# Altium PCB board.PcbDoc
Units mm, origin at the board's own origin, x right, y up, seen from the top; angles counter-clockwise.
Board outline 123 x 60 mm, 2 copper layers (Top Layer, Bottom Layer); 114 components, 68 nets, 312 pads, 0 vias.
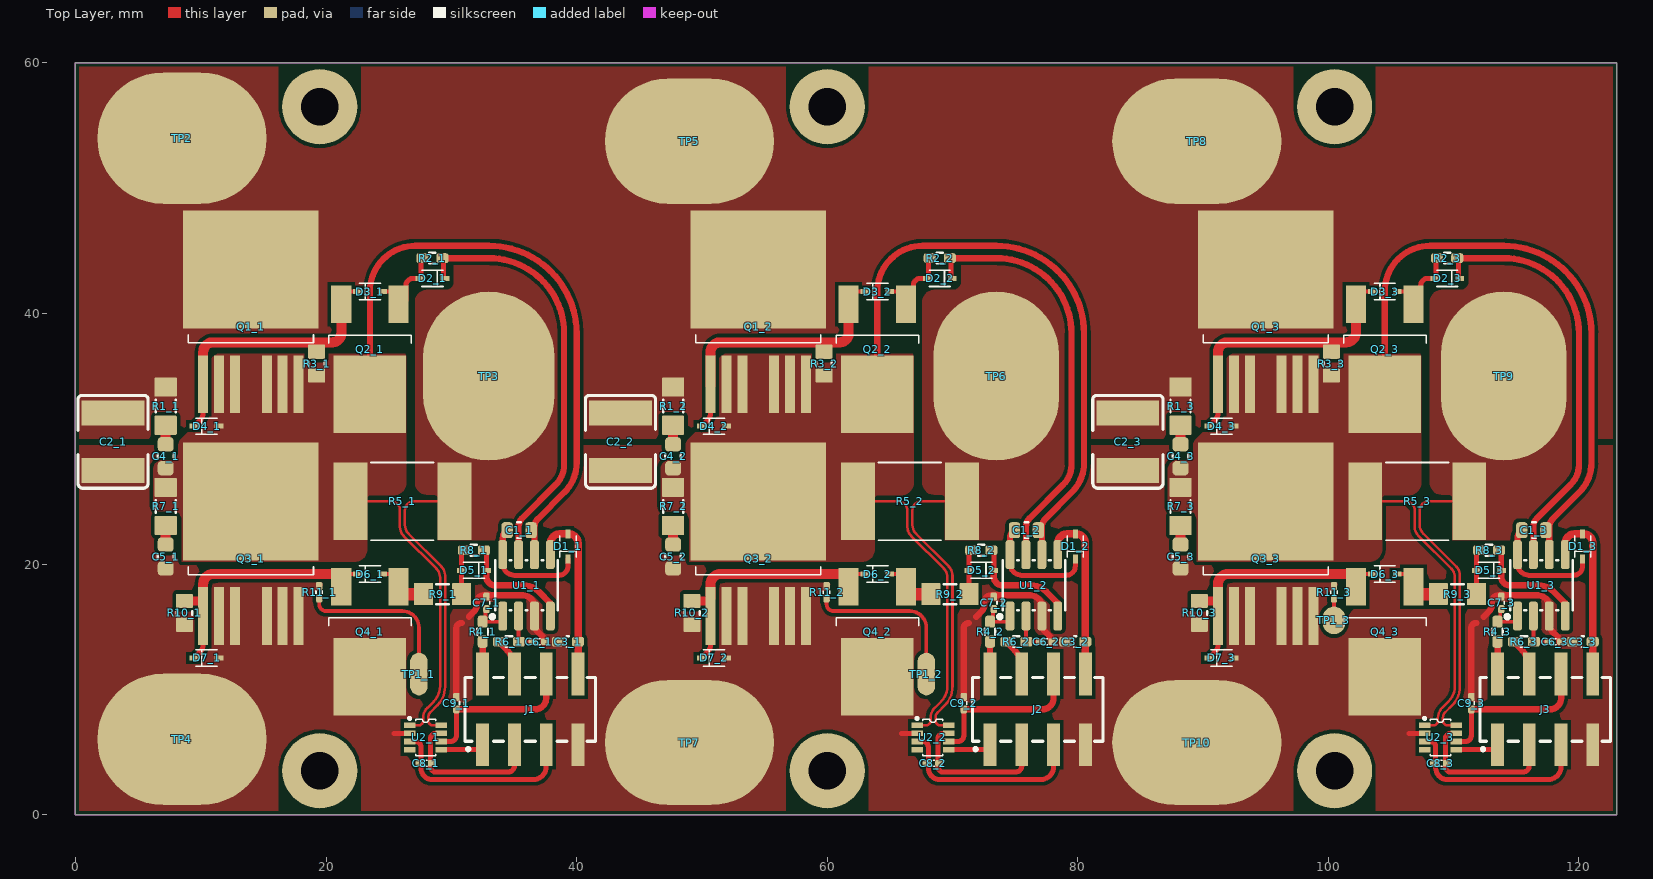
[diagram p0: Top Layer view]
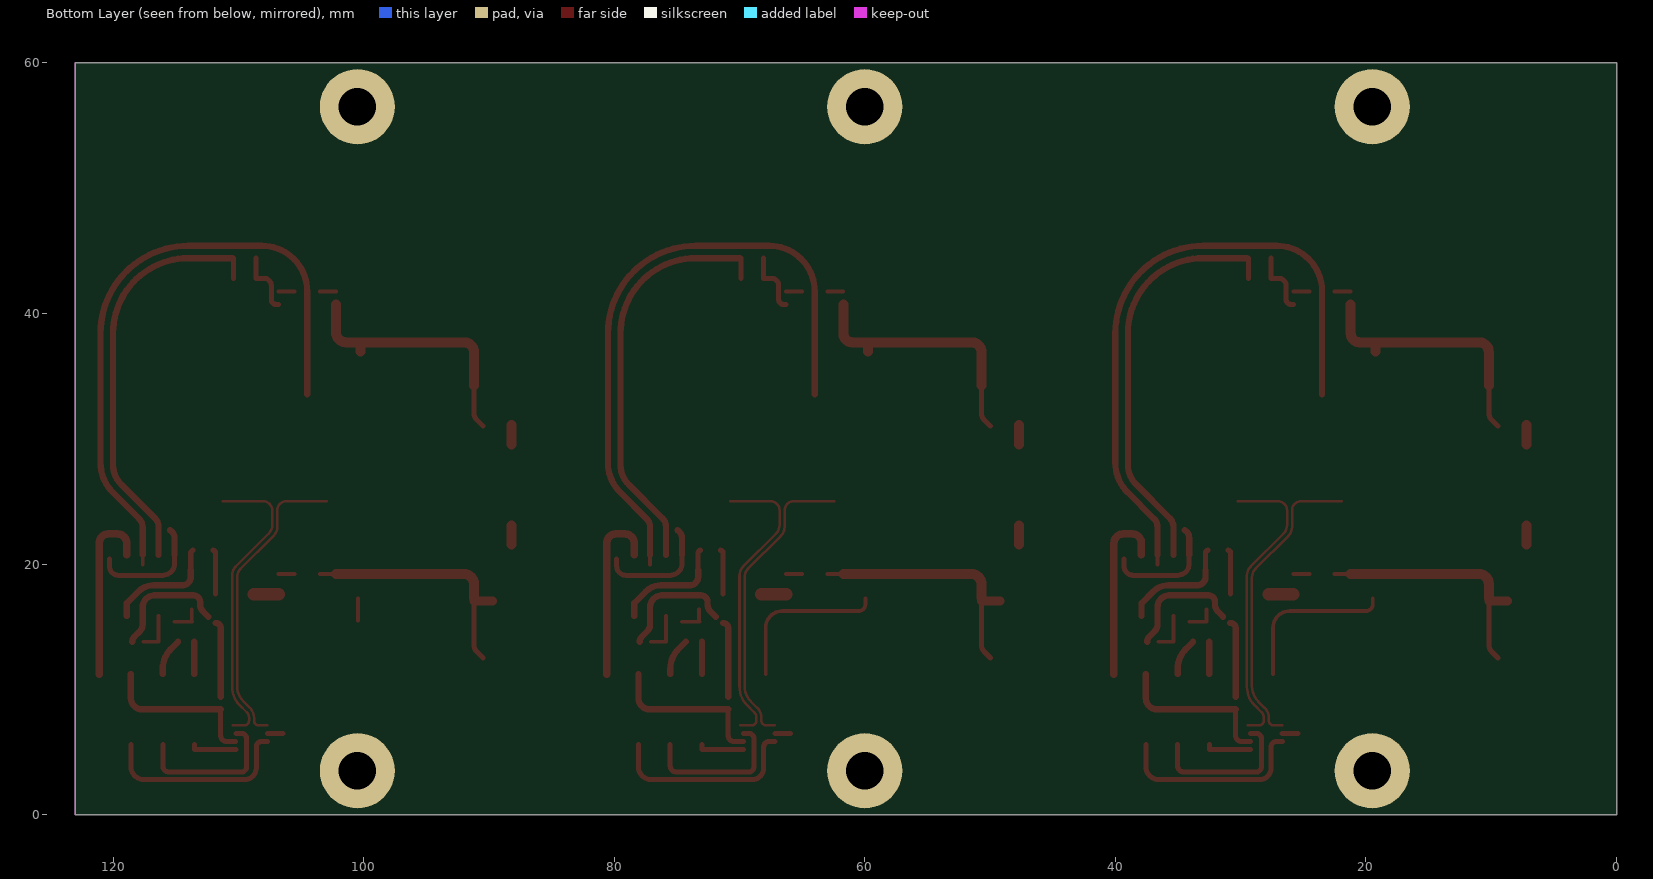
[diagram p1: Bottom Layer view, seen from below]
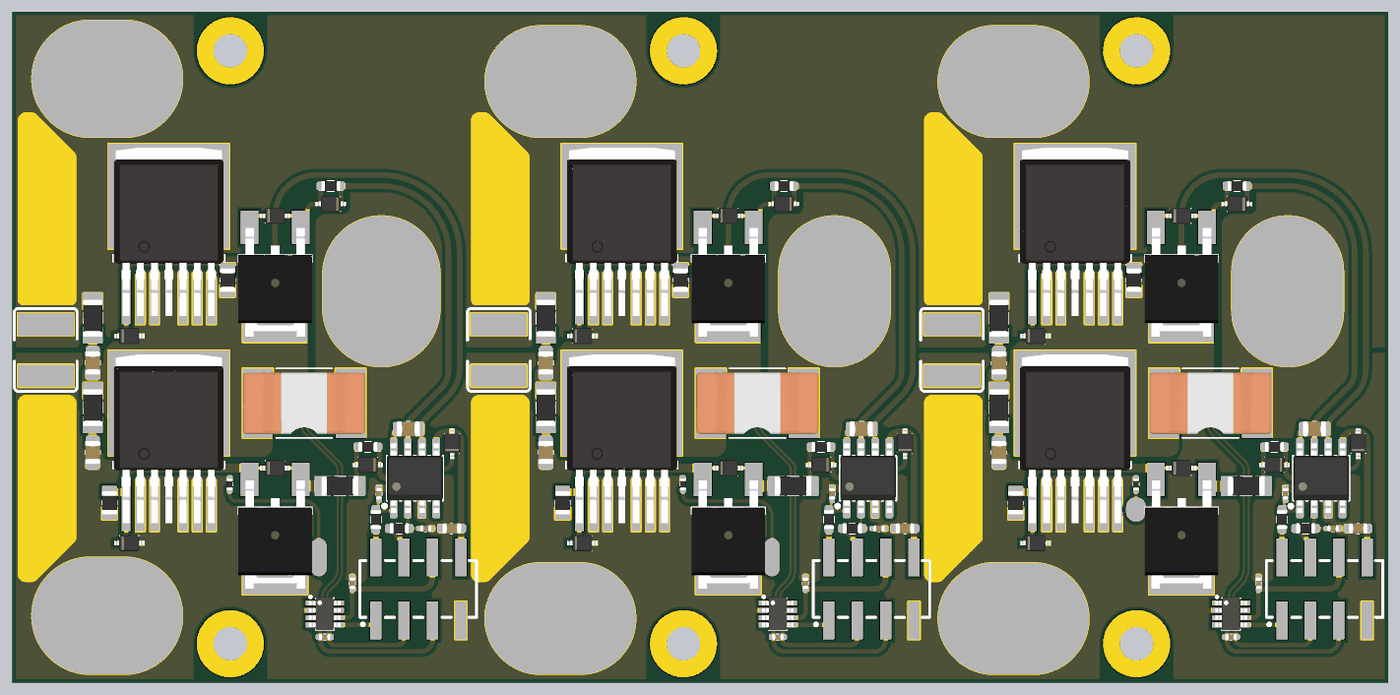
[diagram p2: 3D render of the assembled board from above, using the file's embedded part models]

## Layer stack, top to bottom
Top Solder: solder mask 0.0102, Solder Resist, Dk 3.5
Top Layer: signal copper 0.0356
Dielectric 1: dielectric 0.32, FR-4, Dk 4.8
Bottom Layer: signal copper 0.0356
Bottom Solder: solder mask 0.0102, Solder Resist, Dk 3.5

## Board outline
0,0 123,0 123,60 0,60

## Design rules (kind name [scope] priority, off if disabled: settings)
AcuteAngle [All] p1: minimum=6.00000000000000E+0001 checktracksonly=FALSE
Clearance [All] p1: gap=0.18 ignorepadtopadclearanceinfootprint=FALSE except(0.3: Arc-Fill Arc-Poly Arc-Region Track-Fill Track-Poly Track-Region SMDPad-Fill SMDPad-Poly SMDPad-Region THPad-Fill THPad-Poly THPad-Region Via-Fill Via-Poly Via-Region Fill-Fill Fill-Poly Fill-Region Poly-Poly Poly-Region Region-Region)
ComponentClearance ComponentClearance_1 [HasFootprint('TP2030_SMD')] p1: gap=-1 collisioncheckmode=3 verticalgap=2540 showdistances=FALSE
ComponentClearance [All] p2: gap=0.254 collisioncheckmode=3 verticalgap=0.254 showdistances=FALSE
HoleSize [All] p1: absolutevalues=TRUE maxlimit=5 minlimit=1 maxpercent=80.000 minpercent=20.000
MinimumSolderMaskSliver [All] p1 off: minsoldermaskwidth=0.254
PermittedLayers [All] p1: toplayerpermitted=TRUE bottomlayerpermitted=FALSE
PlaneConnect [All] p1: planeconnectstyle=Direct reliefexpansion=0.508 reliefentries=4 reliefconductorwidth=0.254 reliefairgap=0.254
PolygonConnect [All] p1: connectstyle=Direct reliefconductorwidth=0.254 reliefentries=4 polygonreliefangle="90 Angle" airgapwidth=0.254
RoutingLayers [All] p1: top layer_v5=TRUE bottom layer_v5=FALSE
RoutingVias [All] p1: holewidth=0.711 width=1.27 viastyle="Through Hole" minholewidth=0.711 minwidth=1.27 maxholewidth=0.711 maxwidth=1.27
SilkToSolderMaskClearance [IsPad] p1 off: minsilkscreentomaskgap=0.254 clearancetoexposedcopper=TRUE
SolderMaskExpansion [All] p1: expansion=0.102 istentingtop=FALSE
UnRoutedNet [All] p1: checkbadconnections=TRUE
Width [All] p1: maxlimit=50 minlimit=0.2 preferedwidth=0.254
23 further rules are at their usual default settings.

## Classes and differential pairs
net class C2_3_Nets: GND VB
net class C1_2_Nets: NetC1_2_1 NetC1_2_2
net class C1_1_Nets: NetC1_1_1 NetC1_1_2
net class U1_3_Nets: GND NetC1_3_1 NetC1_3_2 NetC6_3_2 NetC7_3_2 NetD2_3_2 NetD5_3_2 W_Vcc
net class U1_2_Nets: GND NetC1_2_1 NetC1_2_2 NetC6_2_2 NetC7_2_2 NetD2_2_2 NetD5_2_2 V_Vcc
net class U1_1_Nets: GND NetC1_1_1 NetC1_1_2 NetC6_1_2 NetC7_1_2 NetD2_1_2 NetD5_1_2 U_Vcc
net class R10_3_Nets: GND NetD6_3_2
net class R10_2_Nets: GND NetD6_2_2
net class R10_1_Nets: GND NetD6_1_2
net class R9_3_Nets: NetD5_3_1 NetD6_3_1
net class R9_2_Nets: NetD5_2_1 NetD6_2_1
net class R9_1_Nets: NetD5_1_1 NetD6_1_1
net class R3_3_Nets: NetC1_3_2 NetD3_3_2
net class R3_2_Nets: NetC1_2_2 NetD3_2_2
net class R3_1_Nets: NetC1_1_2 NetD3_1_2
net class R1_3_Nets: NetC4_3_2 VB
net class R1_2_Nets: NetC4_2_2 VB
net class R1_1_Nets: NetC4_1_2 VB
net class Q2_3_Nets: NetC1_3_2 NetD2_3_1 NetD3_3_2
net class Q2_2_Nets: NetC1_2_2 NetD2_2_1 NetD3_2_2
net class Q2_1_Nets: NetC1_1_2 NetD2_1_1 NetD3_1_2
net class D4_3_Nets: NetC1_3_2 NetD3_3_2
net class D4_2_Nets: NetC1_2_2 NetD3_2_2
net class D4_1_Nets: NetC1_1_2 NetD3_1_2
net class C7_3_Nets: GND NetC7_3_2
net class C7_2_Nets: GND NetC7_2_2
net class C7_1_Nets: GND NetC7_1_2
net class C6_3_Nets: GND NetC6_3_2
net class C6_2_Nets: GND NetC6_2_2
net class C6_1_Nets: GND NetC6_1_2
net class TP5_Nets: VB
net class TP2_Nets: VB
net class TP1_3_Nets: NetR11_3_1
net class TP1_2_Nets: NetR11_2_1
net class TP1_1_Nets: NetR11_1_1
net class C9_3_Nets: GND W_5V
net class C9_2_Nets: GND V_5V
net class C9_1_Nets: GND U_5V
net class C5_3_Nets: GND NetC5_3_2
net class C5_2_Nets: GND NetC5_2_2
net class C5_1_Nets: GND NetC5_1_2
net class C2_2_Nets: GND VB
net class C2_1_Nets: GND VB
net class C1_3_Nets: NetC1_3_1 NetC1_3_2
net class J3_Nets: GND NetJ3_1 NetJ3_2 NetJ3_3 NetJ3_4 NetJ3_5 NetJ3_6 NetJ3_7 NetJ3_8 W_5V W_H W_Iout W_L W_ref_+ W_ref_- W_Vcc
net class J2_Nets: GND NetJ2_1 NetJ2_2 NetJ2_3 NetJ2_4 NetJ2_5 NetJ2_6 NetJ2_7 NetJ2_8 V_5V V_H V_Iout V_L V_ref_+ V_ref_- V_Vcc
net class J1_Nets: GND NetJ1_1 NetJ1_2 NetJ1_3 NetJ1_4 NetJ1_5 NetJ1_6 NetJ1_7 NetJ1_8 U_5V U_H U_Iout U_L U_ref_+ U_ref_- U_Vcc
net class Q4_1_Nets: GND NetD6_1_1 NetD6_1_2
net class D6_1_Nets: NetD6_1_1 NetD6_1_2
net class D7_3_Nets: GND NetD6_3_2
net class D7_2_Nets: GND NetD6_2_2
net class TP10_Nets: GND
net class TP7_Nets: GND
net class TP9_Nets: W_OUT
net class TP8_Nets: VB
net class TP6_Nets: V_OUT
net class TP3_Nets: U_OUT
net class U2_3_Nets: GND NetC1_3_2 W_5V W_Iout W_OUT W_ref_+ W_ref_-
net class U2_2_Nets: GND NetC1_2_2 V_5V V_Iout V_OUT V_ref_+ V_ref_-
net class U2_1_Nets: GND NetC1_1_2 U_5V U_Iout U_OUT U_ref_+ U_ref_-
net class Q3_3_Nets: GND NetC1_3_2 NetD6_3_2
net class Q3_2_Nets: GND NetC1_2_2 NetD6_2_2
net class Q3_1_Nets: GND NetC1_1_2 NetD6_1_2
net class TP4_Nets: GND NetR12_1
net class R11_3_Nets: GND NetR11_3_1
net class R11_2_Nets: GND NetR11_2_1
net class R11_1_Nets: GND NetR11_1_1
net class R8_3_Nets: NetD5_3_1 NetD5_3_2
net class R8_2_Nets: NetD5_2_1 NetD5_2_2
net class R8_1_Nets: NetD5_1_1 NetD5_1_2
net class R7_3_Nets: NetC1_3_2 NetC5_3_2
net class R7_2_Nets: NetC1_2_2 NetC5_2_2
net class R7_1_Nets: NetC1_1_2 NetC5_1_2
net class R6_3_Nets: NetC6_3_2 W_L
net class R6_2_Nets: NetC6_2_2 V_L
net class R6_1_Nets: NetC6_1_2 U_L
net class R5_3_Nets: NetC1_3_2 W_OUT
net class R5_2_Nets: NetC1_2_2 V_OUT
net class R5_1_Nets: NetC1_1_2 U_OUT
net class R4_3_Nets: NetC7_3_2 W_H
net class R4_2_Nets: NetC7_2_2 V_H
net class R4_1_Nets: NetC7_1_2 U_H
net class R2_3_Nets: NetD2_3_1 NetD2_3_2
net class R2_2_Nets: NetD2_2_1 NetD2_2_2
net class R2_1_Nets: NetD2_1_1 NetD2_1_2
net class Q4_3_Nets: GND NetD6_3_1 NetD6_3_2
net class Q4_2_Nets: GND NetD6_2_1 NetD6_2_2
net class Q1_3_Nets: NetC1_3_2 NetD3_3_2 VB
net class Q1_2_Nets: NetC1_2_2 NetD3_2_2 VB
net class Q1_1_Nets: NetC1_1_2 NetD3_1_2 VB
net class D6_3_Nets: NetD6_3_1 NetD6_3_2
net class D6_2_Nets: NetD6_2_1 NetD6_2_2
net class D7_1_Nets: GND NetD6_1_2
net class D5_3_Nets: NetD5_3_1 NetD5_3_2
net class D5_2_Nets: NetD5_2_1 NetD5_2_2
net class D5_1_Nets: NetD5_1_1 NetD5_1_2
net class D3_3_Nets: NetD2_3_1 NetD3_3_2
net class D3_2_Nets: NetD2_2_1 NetD3_2_2
net class D3_1_Nets: NetD2_1_1 NetD3_1_2
net class D2_3_Nets: NetD2_3_1 NetD2_3_2
net class D2_2_Nets: NetD2_2_1 NetD2_2_2
net class D2_1_Nets: NetD2_1_1 NetD2_1_2
net class D1_3_Nets: NetC1_3_1 W_Vcc
net class D1_2_Nets: NetC1_2_1 V_Vcc
net class D1_1_Nets: NetC1_1_1 U_Vcc
net class C8_3_Nets: W_ref_+ W_ref_-
net class C8_2_Nets: V_ref_+ V_ref_-
net class C8_1_Nets: U_ref_+ U_ref_-
net class C4_3_Nets: NetC1_3_2 NetC4_3_2
net class C4_2_Nets: NetC1_2_2 NetC4_2_2
net class C4_1_Nets: NetC1_1_2 NetC4_1_2
net class C3_3_Nets: GND W_Vcc
net class C3_2_Nets: GND V_Vcc
net class C3_1_Nets: GND U_Vcc
channel class power_phase: "Phase U" "Phase V" "Phase W"

## Components (designator, comment, footprint, x,y, rotation, side; value= is the part's Value field where it differs from the comment)
C1_1 "100nF" C0805_L 35.41,22.7 r0 top (schematic designator C1)
C1_2 "100nF" C0805_L 75.9,22.7 r0 top (schematic designator C1)
C1_3 "100nF" C0805_L 116.4,22.7 r0 top (schematic designator C1)
C2_1 "10uF" C2220 3,29.75 r90 top (schematic designator C2)
C2_2 "10uF" C2220 43.5,29.75 r90 top (schematic designator C2)
C2_3 "10uF" C2220 84,29.75 r90 top (schematic designator C2)
C3_1 "100nF" C0603 39.3,13.8 r0 top (schematic designator C3)
C3_2 "100nF" C0603 79.8,13.8 r0 top (schematic designator C3)
C3_3 "100nF" C0603 120.3,13.8 r0 top (schematic designator C3)
C4_1 "33nF" C0805 7.2,28.6 r90 top (schematic designator C4)
C4_2 "33nF" C0805 47.7,28.6 r90 top (schematic designator C4)
C4_3 "33nF" C0805 88.2,28.6 r90 top (schematic designator C4)
C5_1 "33nF" C0805 7.2,20.6 r90 top (schematic designator C5)
C5_2 "33nF" C0805 47.7,20.6 r90 top (schematic designator C5)
C5_3 "33nF" C0805 88.2,20.6 r90 top (schematic designator C5)
C6_1 "100pF" C0402 36.965,13.8 r180 top (schematic designator C6)
C6_2 "100pF" C0402 77.465,13.8 r180 top (schematic designator C6)
C6_3 "100pF" C0402 118.065,13.8 r180 top (schematic designator C6)
C7_1 "100pF" C0402 32.8,16.9 r270 top (schematic designator C7)
C7_2 "100pF" C0402 73.3,16.9 r270 top (schematic designator C7)
C7_3 "100pF" C0402 113.8,16.9 r270 top (schematic designator C7)
C8_1 "100nF" C0402 27.94,4.1 r0 top (schematic designator C8)
C8_2 "100nF" C0402 68.44,4.1 r0 top (schematic designator C8)
C8_3 "100nF" C0402 108.95,4.1 r0 top (schematic designator C8)
C9_1 "100nF" C0402 30.4,8.9 r270 top (schematic designator C9)
C9_2 "100nF" C0402 70.9,8.9 r270 top (schematic designator C9)
C9_3 "100nF" C0402 111.41,8.9 r270 top (schematic designator C9)
D1_1 "FR107WS" SOD-323 39.31,21.4 r90 top (schematic designator D1)
D1_2 "FR107WS" SOD-323 79.8,21.4 r90 top (schematic designator D1)
D1_3 "FR107WS" SOD-323 120.3,21.4 r90 top (schematic designator D1)
D2_1 "B0530WS" SOD-323 28.486,42.8 r180 top (schematic designator D2)
D2_2 "B0530WS" SOD-323 68.986,42.8 r180 top (schematic designator D2)
D2_3 "B0530WS" SOD-323 109.486,42.8 r180 top (schematic designator D2)
D3_1 "B0530WS" SOD-323 23.5,41.75 r0 top (schematic designator D3)
D3_2 "B0530WS" SOD-323 64,41.75 r0 top (schematic designator D3)
D3_3 "B0530WS" SOD-323 104.5,41.75 r0 top (schematic designator D3)
D4_1 "B0530WS" SOD-323 10.46,31 r0 top (schematic designator D4)
D4_2 "B0530WS" SOD-323 50.96,31 r0 top (schematic designator D4)
D4_3 "B0530WS" SOD-323 91.46,31 r0 top (schematic designator D4)
D5_1 "B0530WS" SOD-323 31.8,19.5 r180 top (schematic designator D5)
D5_2 "B0530WS" SOD-323 72.3,19.5 r180 top (schematic designator D5)
D5_3 "B0530WS" SOD-323 112.824,19.5 r180 top (schematic designator D5)
D6_1 "B0530WS" SOD-323 23.5,19.2 r0 top (schematic designator D6)
D6_2 "B0530WS" SOD-323 64,19.2 r0 top (schematic designator D6)
D6_3 "B0530WS" SOD-323 104.5,19.2 r0 top (schematic designator D6)
D7_1 "B0530WS" SOD-323 10.46,12.5 r0 top (schematic designator D7)
D7_2 "B0530WS" SOD-323 50.96,12.5 r0 top (schematic designator D7)
D7_3 "B0530WS" SOD-323 91.46,12.5 r0 top (schematic designator D7)
J1 "" HDR-SMD_8P-P2.54-V-M-R2-C4-LS8.0 36.3,8.4 r0 top
J2 "" HDR-SMD_8P-P2.54-V-M-R2-C4-LS8.0 76.8,8.4 r0 top
J3 "" HDR-SMD_8P-P2.54-V-M-R2-C4-LS8.0 117.3,8.4 r0 top
Q1_1 "IPB036N12N3" TO-263-7 14,43.5 r0 top (schematic designator Q1)
Q1_2 "IPB036N12N3" TO-263-7 54.5,43.5 r0 top (schematic designator Q1)
Q1_3 "IPB036N12N3" TO-263-7 95,43.5 r0 top (schematic designator Q1)
Q2_1 "MJD45H11" TO-252AA 23.5,33.55 r180 top (schematic designator Q2)
Q2_2 "MJD45H11" TO-252AA 64,33.55 r180 top (schematic designator Q2)
Q2_3 "MJD45H11" TO-252AA 104.5,33.55 r180 top (schematic designator Q2)
Q3_1 "IPB036N12N3" TO-263-7 14,25 r0 top (schematic designator Q3)
Q3_2 "IPB036N12N3" TO-263-7 54.5,25 r0 top (schematic designator Q3)
Q3_3 "IPB036N12N3" TO-263-7 95,25 r0 top (schematic designator Q3)
Q4_1 "MJD45H11" TO-252AA 23.5,11 r180 top (schematic designator Q4)
Q4_2 "MJD45H11" TO-252AA 64,11 r180 top (schematic designator Q4)
Q4_3 "MJD45H11" TO-252AA 104.5,11 r180 top (schematic designator Q4)
R1_1 "1R" R1206 7.2,32.6 r90 top (schematic designator R1)
R1_2 "1R" R1206 47.7,32.6 r90 top (schematic designator R1)
R1_3 "1R" R1206 88.2,32.6 r90 top (schematic designator R1)
R2_1 "24" R0603 28.486,44.412 r0 top (schematic designator R2)
R2_2 "24" R0603 68.986,44.412 r0 top (schematic designator R2)
R2_3 "24" R0603 109.486,44.412 r0 top (schematic designator R2)
R3_1 "100k" R0805 19.25,36 r270 top (schematic designator R3)
R3_2 "100k" R0805 59.75,36 r270 top (schematic designator R3)
R3_3 "100k" R0805 100.25,36 r270 top (schematic designator R3)
R4_1 "2k" R0603 32.5,14.6 r270 top (schematic designator R4)
R4_2 "2k" R0603 73,14.6 r270 top (schematic designator R4)
R4_3 "2k" R0603 113.5,14.6 r270 top (schematic designator R4)
R5_1 "1mR" RES_CSS2H-3920R 26.1,25 r0 top (schematic designator R5)
R5_2 "1mR" RES_CSS2H-3920R 66.6,25 r0 top (schematic designator R5)
R5_3 "1mR" RES_CSS2H-3920R 107.1,25 r0 top (schematic designator R5)
R6_1 "2k" R0603 34.6,13.8 r180 top (schematic designator R6)
R6_2 "2k" R0603 75.1,13.8 r180 top (schematic designator R6)
R6_3 "2k" R0603 115.61,13.8 r180 top (schematic designator R6)
R7_1 "1R" R1206 7.2,24.6 r90 top (schematic designator R7)
R7_2 "1R" R1206 47.7,24.6 r90 top (schematic designator R7)
R7_3 "1R" R1206 88.2,24.6 r90 top (schematic designator R7)
R8_1 "24" R0603 31.8,21.1 r0 top (schematic designator R8)
R8_2 "24" R0603 72.3,21.1 r0 top (schematic designator R8)
R8_3 "24" R0603 112.823,21.1 r0 top (schematic designator R8)
R9_1 "0" R1206 29.3,17.6 r0 top (schematic designator R9)
R9_2 "0" R1206 69.8,17.6 r0 top (schematic designator R9)
R9_3 "0" R1206 110.3,17.6 r0 top (schematic designator R9)
R10_1 "100k" R0805 8.7,16.1 r270 top (schematic designator R10)
R10_2 "100k" R0805 49.2,16.1 r270 top (schematic designator R10)
R10_3 "100k" R0805 89.7,16.1 r270 top (schematic designator R10)
R11_1 "10k NTC" R0402 19.45,17.75 r90 top (schematic designator R11)
R11_2 "10k NTC" R0402 59.95,17.75 r90 top (schematic designator R11)
R11_3 "10k NTC" R0402 100.45,17.75 r90 top (schematic designator R11)
TP1_1 "" TP2030_SMD#1 19.45,11.22 r180 top (schematic designator TP1)
TP1_2 "" TP2030_SMD#2 59.95,15.5 r180 top (schematic designator TP1)
TP1_3 "" TP2030_SMD#3 100.35,13.6 r180 top (schematic designator TP1)
TP2 "" TP2030_SMD#4 8.5,54 r180 top
TP3 "" TP2030_SMD#5 33,35 r180 top
TP4 "" TP2030_SMD#4 8.5,6 r180 top
TP5 "" TP2030_SMD#6 49,53.75 r180 top
TP6 "" TP2030_SMD#6 73.5,35 r270 top
TP7 "" TP2030_SMD#6 49,5.75 r180 top
TP8 "" TP2030_SMD#6 89.5,53.75 r180 top
TP9 "" TP2030_SMD#7 113.6,35 r90 top
TP10 "" TP2030_SMD#6 89.5,5.75 r180 top
U1_1 "IRS2186" SO-8 36,18.3 r0 top (schematic designator U1)
U1_2 "IRS2186" SO-8 76.5,18.3 r0 top (schematic designator U1)
U1_3 "IRS2186" SO-8 117,18.3 r0 top (schematic designator U1)
U2_1 "INA241A1" SOT-23-8 27.94,6.159 r270 top (schematic designator U2)
U2_2 "INA241A1" SOT-23-8 68.44,6.159 r270 top (schematic designator U2)
U2_3 "INA241A1" SOT-23-8 108.95,6.159 r270 top (schematic designator U2)

## Footprints (in the part's own frame and the unit in brackets; to place one, negate y for a bottom-side part, rotate by r counter-clockwise, add the part's x,y. Pads: shape width x height; smd on the part's side, far side on the other; paste and mask are expansions set on the pad)
C0402 [mm] "Chip Capacitor Body"
  rrect50% 0.635x0.508 smd mask+0.05: 1(-0.5,0) 2(0.5,0)
  silkscreen extent -0.13,-0.25 0.13,0.25, body extent -0.52,-0.27 0.53,0.28, height 0.55
C0603 [mil] "Chip Capacitor"
  rrect50% 38x31 smd mask+1.97: 1(-31.5,0) 2(31.5,0)
  silkscreen extent -3,-17 3,17, body extent -33,-18 33,18, height 35
C0805 [mil] "Chip Capacitor"
  rrect50% 45x50 smd mask+1.97: 1(-37.5,0) 2(37.5,0)
  silkscreen extent -6,-25 6,25, body extent -41,-27 41,27, height 53
C0805_L [mm] "Chip Capacitor"
  rrect50% 0.91x1.27 smd mask+0.05: 1(-0.953,0) 2(0.953,0)
  silkscreen extent -0.15,-0.63 0.15,0.63, body extent -1.05,-0.68 1.05,0.67, height 1.35
C2220 [mm]
  rect 2x5 smd: 1(-2.3,0) 2(2.3,0)
  silkscreen extent -3.7,-2.8 3.7,2.8
HDR-SMD_8P-P2.54-V-M-R2-C4-LS8.0 [mm]
  rect 1.02x3.4 smd: 1(-3.81,-2.82) 2(-3.81,2.82) 3(-1.27,-2.82) 4(-1.27,2.82) 5(1.27,-2.82) 6(1.27,2.82) 7(3.81,-2.82) 8(3.81,2.82)
  silkscreen extent -5.21,-3.3 5.21,2.54
R0402 [mil]
  rrect50% 25x20 smd mask+1.97: 1(-19.68,0) 2(19.69,0)
  silkscreen extent -5,-10 5,10, body extent -21,-11 21,11, height 16
R0603 [mil] "Chip Resistor; Body 1.6 x 0.8 mm (LxW typ)"
  rrect50% 38x31 smd mask+1.97: 1(-31.5,0) 2(31.5,0)
  silkscreen extent -10,-17 10,17, body extent -33,-18 33,18, height 22
R0805 [mil] "Chip Resistor; Body 1.6 x 0.8 mm (LxW typ)"
  rrect15% 45x53.15 smd: 1(-37.5,0) 2(37.5,0)
  silkscreen extent -6,-25 6,25, body extent -41,-27 41,27, height 24
R1206 [mil] "Chip Resistor"
  rrect10% 60x70 smd mask+1.97: 1(-60,0) 2(60,0)
  silkscreen extent -20,-31 20,31, body extent -65,-33 65,33, height 26
RES_CSS2H-3920R [mm]
  rect 2.7x6.2 smd: 1(-4.15,0) 2(4.15,0)
  silkscreen extent -2.5,-3.1 2.5,3.1, body extent -5.46,-2.76 5.46,2.76, height 1.98
SO-8 [mm] "SOIC, 8-Leads, Body 4.9x3.9mm, Pitch 1.27mm, IPC Low Density"
  rrect50% 0.7x2.3 smd mask+0.05: 1(-1.905,-2.45) 2(-0.635,-2.45) 3(0.635,-2.45) 4(1.905,-2.45) 5(1.905,2.45) 6(0.635,2.45) 7(-0.635,2.45) 8(-1.905,2.45)
  silkscreen extent -2.77,-2.55 2.5,2, body extent -2.5,-3.1 2.5,3.1, height 1.75
SOD-323 [mm]
  rect 0.701x0.403 smd mask+0.05: 1(1,0)
  rect 0.703x0.401 smd mask+0.05: 2(-1,0)
  silkscreen extent -0.85,-0.65 0.85,0.65, body extent -1.35,-0.72 1.35,0.72, height 1.1
SOT-23-8 [mm]
  rect 0.45x0.9 smd: 1(-0.975,-1.26) 2(-0.325,-1.26) 3(0.325,-1.26) 4(0.975,-1.26) 5(0.975,1.26) 6(0.325,1.26) 7(-0.325,1.26) 8(-0.975,1.26)
  silkscreen extent -1.62,-1.37 1.45,0.8, body extent -1.5,-1.42 1.5,1.42, height 1.2
TO-252AA [mm] "D-PAK"
  rect 1.6x3 smd: 1(-2.286,-7.18) 3(2.286,-7.18)
  rect 5.8x6.2 smd: 2(0,0)
  silkscreen extent -3.3,-4.7 3.28,-4.06, body extent -3.3,-7.1 3.28,2.6, height 2.3
TO-263-7 [mm]
  rect 0.8x4.6 smd: 1(-3.81,-9.15) 2(-2.54,-9.15) 3(-1.27,-9.15) 5(1.27,-9.15) 6(2.54,-9.15) 7(3.81,-9.15)
  rect 10.8x9.4 smd: 4(0,0)
  silkscreen extent -5,-5.84 5,-5.21, body extent -4.91,-10.71 4.91,4.34, height 4.22
TP2030_SMD#1 [mm] "TP30_SMD"
  oval 1.4x3.4 smd mask+0.05: 1(-7.96,0)
TP2030_SMD#2 [mm] "TP30_SMD"
  oval 1.4x3.4 smd mask+0.05: 1(-7.96,4.28)
TP2030_SMD#3 [mm] "TP30_SMD"
  oval 1.8x2.2 smd mask+0.05: 1(-0.1,-1.9)
TP2030_SMD#4 [mm] "TP30_SMD"
  oval 13.5x10.5 smd mask+0.05: 1(0,0)
TP2030_SMD#5 [mm] "TP30_SMD"
  oval 10.5x13.5 smd mask+0.05: 1(0,0)
TP2030_SMD#6 [mm] "TP30_SMD"
  oval 13.5x10 smd mask+0.05: 1(0,0)
TP2030_SMD#7 [mm] "TP30_SMD"
  oval 13.5x10 smd mask+0.05: 1(0,-0.4)

## Part data
C1_1 C1_2 C1_3: library part CAP, "100n 0805"
C2_1 C2_2 C2_3: library part CAP, "10uF 100V 2220"
C3_1 C3_2 C3_3: library part CAP, "100n 0603"
C4_1 C4_2 C4_3 C5_1 C5_2 C5_3: library part CAP, "33nF 0805"
C6_1 C6_2 C6_3 C7_1 C7_2 C7_3: library part CAP, "100pF 0402"
C8_1 C8_2 C8_3 C9_1 C9_2 C9_3: library part CAP, "100nF 0402"
D1_1 D1_2 D1_3: library part "Diode 10TQ035_1"
D2_1 D2_2 D2_3 D3_1 D3_2 D3_3 D4_1 D4_2 D4_3 D5_1 D5_2 D5_3 D6_1 D6_2 D6_3 D7_1 D7_2 D7_3: library part "Diode 10TQ035_1", "FR107WS"
J1 J2 J3: library part "Header 8"
Q1_1 Q1_2 Q1_3 Q3_1 Q3_2 Q3_3: library part NMOS-2, "IPB036N12N3GATMA1"
Q2_1 Q2_2 Q2_3 Q4_1 Q4_2 Q4_3: library part PNP, "MJD45H11"
R1_1 R1_2 R1_3 R7_1 R7_2 R7_3: library part Res1, "1R 1206"
R2_1 R2_2 R2_3 R8_1 R8_2 R8_3: library part Res1, "24R 0603"
R3_1 R3_2 R3_3 R10_1 R10_2 R10_3: library part Res1, "100k 0805"
R4_1 R4_2 R4_3 R6_1 R6_2 R6_3: library part Res1, "2k 0603"
R5_1 R5_2 R5_3: library part Res1
R9_1 R9_2 R9_3: library part Res1, "0R 2512"
R11_1 R11_2 R11_3: library part RES
TP1_1 TP1_2 TP1_3 TP2 TP3 TP4 TP5 TP6 TP7 TP8 TP9 TP10: library part TP_Dup1
U1_1 U1_2 U1_3: "IR2186"

## Free pads (board coordinates)
  round 6 hole 3 unplated: M(19.5,3.5) M(19.5,56.5) M(60,3.5) M(60,56.5) M(100.5,3.5) M(100.5,56.5)

## Nets (pads, with @x,y where several pads share a name; then routed paths per layer and width w, separated by ;. In a path a pad name is that pad's centre, name@x,y a point inside that pad or via, vN(x,y) a via of type N, cw(c..) or ccw(c..) an arc to the next point about the centre after c; other vN are vias at no path point)
GND: C2_1.1 C2_2.1 C2_3.1 C3_1.1 C3_2.1 C3_3.1 C5_1.1 C5_2.1 C5_3.1 C6_1.1 C6_2.1 C6_3.1 C7_1.1 C7_2.1 C7_3.1 C9_1.1 C9_2.1 C9_3.1 D7_1.1 D7_2.1 D7_3.1 J1.7 J2.7 J3.7 Q3_1.2 Q3_1.3 Q3_1.5 Q3_1.6 Q3_1.7 Q3_2.2 Q3_2.3 Q3_2.5 Q3_2.6 Q3_2.7 Q3_3.2 Q3_3.3 Q3_3.5 Q3_3.6 Q3_3.7 Q4_1.2 Q4_2.2 Q4_3.2 R10_1.2 R10_2.2 R10_3.2 R11_1.2 R11_2.2 R11_3.2 TP4.1 TP7.1 TP10.1 U1_1.3 U1_2.3 U1_3.3 U2_1.2 U2_2.2 U2_3.2 | length 53.3
  Top Layer w0.4: 25.436,6.484 U2_1.2 ; 65.936,6.484 U2_2.2 ; 106.436,6.484 U2_3.2@107.68,6.484
  Top Layer w0.5: C9_1.1 30.4,14.876 cw(c30.824,14.876) 30.824,15.3 ; 31.4,15.8 31.834,16.234 ccw(c31.313,16.754) 32.049,16.754 32.049,16.975 cw(c32.575,16.975) 32.575,17.5 35.704,17.5 cw(c35.704,16.569) 36.635,16.569 U1_1.3 36.635,15.17 ccw(c37.372,15.17) 36.851,14.649 37.299,14.201 cw(c36.898,13.8) C6_1.1 ; C9_2.1 70.9,14.876 cw(c71.324,14.876) 71.324,15.3 ; 71.9,15.8 72.334,16.234 ccw(c71.813,16.754) 72.549,16.754 72.549,16.975 cw(c73.075,16.975) 73.075,17.5 76.204,17.5 cw(c76.204,16.569) U1_2.3@77.135,16.569 ; C6_2.1 ccw(c77.398,13.8) 77.799,14.201 77.351,14.649 cw(c77.872,15.17) 77.135,15.17 U1_2.3 ; C9_3.1@111.4,9.4 111.4,14.876 cw(c111.824,14.876) 111.824,15.3 ; 112.4,15.8 112.834,16.234 ccw(c112.313,16.754) 113.049,16.754 113.049,16.975 cw(c113.575,16.975) 113.575,17.5 116.704,17.5 cw(c116.704,16.569) U1_3.3@117.635,16.569 ; C6_3.1@118.465,13.8 ccw(c117.898,13.8) 118.299,14.201 117.851,14.649 cw(c118.372,15.17) 117.635,15.17 U1_3.3 ; U1_2.3 U1_2.3@77.135,16.569 ; U1_2.3 U1_2.3@77.135,16.569 ; U1_3.3 U1_3.3@117.635,16.569 ; U1_3.3 U1_3.3@117.635,16.569
NetC1_1_1: C1_1.1 D1_1.2 U1_1.8 | length 9.5
  Top Layer w0.4: U1_1.8@34.105,20.75 34.105,20.031 ccw(c35.036,20.031) 35.036,19.1 38.573,19.1 ccw(c38.573,19.837) 39.31,19.837 D1_1.2
  Top Layer w0.5: U1_1.8@34.105,20.75 34.105,22.086 cw(c34.816,22.086) C1_1.1
NetC1_1_2: C1_1.2 C4_1.1 D4_1.1 Q1_1.2 Q1_1.3 Q1_1.5 Q1_1.6 Q1_1.7 Q2_1.2 Q3_1.4 R3_1.2 R5_1.1 R7_1.2 U1_1.6 U2_1.1 | length 74.6
  Top Layer w0.2: R5_1.1 25.189,25 cw(c25.189,24.289) 25.9,24.289 25.9,22.954 ccw(c26.891,22.954) 26.19,22.253 28.81,19.633 ; U2_1.1 27.394,7.134 ccw(c27.394,7.49) 27.75,7.49 27.75,7.723 cw(c28.883,7.723) 28.082,8.524 28.6,9.042 ccw(c27.392,10.25) 29.1,10.25 29.1,18.933 ccw(c28.11,18.933) 28.811,19.632
  Top Layer w0.3: U1_1.6@36.635,19.937 U1_1.6
  Top Layer w0.5: Q2_1.2 23.5,41.773 cw(c27.127,41.773) 27.127,45.4 33,45.4 cw(c33,38.4) 40,38.4 40,28.074 cw(c36.682,28.074) 39.028,25.728 36.924,23.624 ccw(c37.626,22.925) 36.635,22.925 U1_1.6
NetC1_2_1: C1_2.1 D1_2.2 U1_2.8 | length 9.5
  Top Layer w0.4: U1_2.8 74.595,20.031 ccw(c75.526,20.031) 75.526,19.1 79.063,19.1 ccw(c79.063,19.837) 79.8,19.837 D1_2.2
  Top Layer w0.5: 74.595,22.086 cw(c75.306,22.086) C1_2.1 ; U1_2.8 74.595,22.086
NetC1_2_2: C1_2.2 C4_2.1 D4_2.1 Q1_2.2 Q1_2.3 Q1_2.5 Q1_2.6 Q1_2.7 Q2_2.2 Q3_2.4 R3_2.2 R5_2.1 R7_2.2 U1_2.6 U2_2.1 | length 74.6
  Top Layer w0.2: R5_2.1 65.689,25 cw(c65.689,24.289) 66.4,24.289 66.4,22.954 ccw(c67.391,22.954) 66.69,22.253 69.31,19.633 ; U2_2.1 67.894,7.134 ccw(c67.894,7.49) 68.25,7.49 68.25,7.723 cw(c69.383,7.723) 68.582,8.524 69.1,9.042 ccw(c67.892,10.25) 69.6,10.25 69.6,18.933 ccw(c68.61,18.933) 69.311,19.632
  Top Layer w0.3: U1_2.6@77.135,19.937 U1_2.6
  Top Layer w0.5: Q2_2.2 64,41.773 cw(c67.627,41.773) 67.627,45.4 73.5,45.4 cw(c73.5,38.4) 80.5,38.4 80.5,28.074 cw(c77.182,28.074) 79.528,25.728 77.424,23.624 ccw(c78.126,22.925) 77.135,22.925 U1_2.6
NetC1_3_1: C1_3.1 D1_3.2 U1_3.8 | length 9.5
  Top Layer w0.4: U1_3.8 115.095,20.031 ccw(c116.026,20.031) 116.026,19.1 119.563,19.1 ccw(c119.563,19.837) 120.3,19.837 D1_3.2
  Top Layer w0.5: U1_3.8 115.095,22.086 cw(c115.806,22.086) C1_3.1
NetC1_3_2: C1_3.2 C4_3.1 D4_3.1 Q1_3.2 Q1_3.3 Q1_3.5 Q1_3.6 Q1_3.7 Q2_3.2 Q3_3.4 R3_3.2 R5_3.1 R7_3.2 U1_3.6 U2_3.1 | length 105.4
  Top Layer w0.2: R5_3.1 106.189,25 cw(c106.189,24.289) 106.9,24.289 106.9,22.954 ccw(c107.891,22.954) 107.19,22.253 109.81,19.633 ; U2_3.1@107.68,7.134 108.394,7.134 ccw(c108.394,7.49) 108.75,7.49 108.75,7.723 cw(c109.883,7.723) 109.082,8.524 109.6,9.042 ccw(c108.392,10.25) 110.1,10.25 110.1,18.933 ccw(c109.11,18.933) 109.811,19.632
  Top Layer w0.3: U1_3.6@117.635,19.937 U1_3.6
  Top Layer w0.5: U1_3.6 117.635,22.925 cw(c118.626,22.925) 117.924,23.624 120.028,25.728 ccw(c117.682,28.074) 121,28.074 121,38.4 ; 104.5,41.773 cw(c108.127,41.773) 108.127,45.4 ; 104.5,41.773 cw(c108.127,41.773) 108.127,45.4 ; 104.5,41.773 Q2_3.2 104.5,41.773 ; 108.127,45.4 114,45.4 ; 108.127,45.4 114,45.4 ; 114,45.4 cw(c114,38.4) 121,38.4 ; 114,45.4 cw(c114,38.4) 121,38.4
NetC4_1_2: C4_1.2 R1_1.1 | length 1.5
  Top Layer w0.8: C4_1.2 R1_1.1
NetC4_2_2: C4_2.2 R1_2.1 | length 1.5
  Top Layer w0.8: C4_2.2 R1_2.1
NetC4_3_2: C4_3.2 R1_3.1 | length 1.5
  Top Layer w0.8: C4_3.2 R1_3.1
NetC5_1_2: C5_1.2 R7_1.1 | length 1.5
  Top Layer w0.8: C5_1.2 R7_1.1
NetC5_2_2: C5_2.2 R7_2.1 | length 1.5
  Top Layer w0.8: C5_2.2 R7_2.1
NetC5_3_2: C5_3.2 R7_3.1 | length 1.5
  Top Layer w0.8: C5_3.2 R7_3.1
NetC6_1_2: C6_1.2 R6_1.1 U1_1.2 | length 3.2
  Top Layer w0.3: R6_1.1@35.365,13.8 U1_1.2 ; R6_1.1 C6_1.2 C6_1.2@36.565,13.8
NetC6_2_2: C6_2.2 R6_2.1 U1_2.2 | length 3.2
  Top Layer w0.3: R6_2.1@75.865,13.8 U1_2.2 ; R6_2.1 C6_2.2 C6_2.2@77.065,13.8
NetC6_3_2: C6_3.2 R6_3.1 U1_3.2 | length 3.2
  Top Layer w0.3: R6_3.1@116.365,13.8 U1_3.2 ; R6_3.1@116.4,13.8 117.465,13.8 C6_3.2
NetC7_1_2: C7_1.2 R4_1.1 U1_1.1 | length 2.3
  Top Layer w0.3: R4_1.1@32.7,15.4 U1_1.1@34.1,15.4 ; R4_1.1@32.725,15.5 C7_1.2@32.725,16.4
NetC7_2_2: C7_2.2 R4_2.1 U1_2.1 | length 2.3
  Top Layer w0.3: R4_2.1@73.2,15.4 U1_2.1@74.6,15.4 ; R4_2.1@73.225,15.5 C7_2.2@73.225,16.4
NetC7_3_2: C7_3.2 R4_3.1 U1_3.1 | length 2.3
  Top Layer w0.3: R4_3.1@113.7,15.4 U1_3.1@115.1,15.4 ; R4_3.1@113.725,15.5 C7_3.2@113.725,16.4
NetD2_1_1: D2_1.1 D3_1.1 Q2_1.1 R2_1.1 | length 6.3
  Top Layer w0.3: D3_1.1 Q2_1.1@25.786,41.75
  Top Layer w0.4: Q2_1.1 26.014,40.73 ccw(c26.014,41.086) 26.37,41.086 26.37,42.218 cw(c26.951,42.218) 26.951,42.8 D2_1.1 ; D2_1.1@27.586,42.8 R2_1.1@27.586,44.412
NetD2_1_2: D2_1.2 R2_1.2 U1_1.7 | length 33.6
  Top Layer w0.4: D2_1.2@29.386,42.8 R2_1.2@29.386,44.412
  Top Layer w0.5: R2_1.2@29.486,44.412 33,44.412 cw(c33,38.412) 39,38.412 39,27.924 cw(c36.769,27.924) 38.346,26.346 35.655,23.655 ccw(c36.356,22.955) 35.365,22.955 U1_1.7
NetD2_2_1: D2_2.1 D3_2.1 Q2_2.1 R2_2.1 | length 6.3
  Top Layer w0.3: D3_2.1 Q2_2.1@66.286,41.75
  Top Layer w0.4: Q2_2.1 66.514,40.73 ccw(c66.514,41.086) 66.87,41.086 66.87,42.218 cw(c67.451,42.218) 67.451,42.8 D2_2.1 ; D2_2.1@68.086,42.8 R2_2.1@68.086,44.412
NetD2_2_2: D2_2.2 R2_2.2 U1_2.7 | length 33.6
  Top Layer w0.4: D2_2.2@69.886,42.8 R2_2.2@69.886,44.412
  Top Layer w0.5: R2_2.2@69.986,44.412 73.5,44.412 cw(c73.5,38.412) 79.5,38.412 79.5,27.924 cw(c77.269,27.924) 78.846,26.346 76.155,23.655 ; U1_2.7 75.865,22.955 cw(c76.856,22.955) 76.154,23.654
NetD2_3_1: D2_3.1 D3_3.1 Q2_3.1 R2_3.1 | length 6.3
  Top Layer w0.3: D3_3.1 Q2_3.1@106.786,41.75
  Top Layer w0.4: Q2_3.1 107.014,40.73 ccw(c107.014,41.086) 107.37,41.086 107.37,42.218 cw(c107.951,42.218) 107.951,42.8 D2_3.1 ; D2_3.1@108.586,42.8 R2_3.1@108.586,44.412
NetD2_3_2: D2_3.2 R2_3.2 U1_3.7 | length 33.6
  Top Layer w0.4: D2_3.2@110.386,42.8 R2_3.2@110.386,44.412
  Top Layer w0.5: R2_3.2@110.486,44.412 114,44.412 cw(c114,38.412) 120,38.412 120,27.924 cw(c117.769,27.924) 119.346,26.346 116.655,23.655 ; U1_3.7 116.365,22.955 cw(c117.356,22.955) 116.654,23.654
NetD3_1_2: D3_1.2 D4_1.2 Q1_1.1 Q2_1.3 R3_1.1 | length 22.4
  Top Layer w0.3: Q2_1.3@21.214,41.75 D3_1.2
  Top Layer w0.4: D4_1.2 9.982,31.522 ccw(c9.479,32.025) 10.19,32.025 Q1_1.1@10.19,34.253
  Top Layer w0.8: Q1_1.1@10.19,34.253 Q1_1.1 10.19,36.9 cw(c10.99,36.9) 10.99,37.7 19.25,37.7 ; R3_1.1 19.25,37.7 ; Q2_1.3 21.214,38.411 cw(c20.503,38.411) 20.503,37.7 19.25,37.7
NetD3_2_2: D3_2.2 D4_2.2 Q1_2.1 Q2_2.3 R3_2.1 | length 27.5
  Top Layer w0.3: Q2_2.3@61.714,41.75 D3_2.2
  Top Layer w0.4: Q1_2.1@50.69,34.253 50.69,32.025 ; Q1_2.1@50.69,35.795 Q1_2.1 50.69,32.025 ; 50.482,31.522 ccw(c49.979,32.025) 50.69,32.025 ; 50.482,31.522 ccw(c49.979,32.025) 50.69,32.025 ; 50.482,31.522 D4_2.2 50.482,31.522
  Top Layer w0.8: Q1_2.1@50.69,34.253 Q1_2.1 50.69,36.9 cw(c51.49,36.9) 51.49,37.7 61.003,37.7 ccw(c61.003,38.411) 61.714,38.411 Q2_2.3 ; R3_2.1 59.75,37.7
NetD3_3_2: D3_3.2 D4_3.2 Q1_3.1 Q2_3.3 R3_3.1 | length 27.4
  Top Layer w0.3: Q2_3.3@102.214,41.75 D3_3.2
  Top Layer w0.4: Q1_3.1@91.19,34.253 91.19,32.025 ; Q1_3.1@91.19,35.795 Q1_3.1 91.19,32.025 ; 90.982,31.522 ccw(c90.479,32.025) 91.19,32.025 ; 90.982,31.522 ccw(c90.479,32.025) 91.19,32.025 ; 90.982,31.522 D4_3.2 90.982,31.522
  Top Layer w0.8: Q1_3.1@91.19,34.253 Q1_3.1 91.19,35.795 91.19,36.9 cw(c91.99,36.9) 91.99,37.7 100.25,37.7 ; R3_3.1 100.25,37.7 ; Q2_3.3 102.214,38.514 cw(c101.4,38.514) 101.4,37.7 100.25,37.7
NetD5_1_1: D5_1.1 R8_1.1 R9_1.2 | length 3.6
  Top Layer w0.4: R9_1.2@30.8,17.6 D5_1.1 30.8,20.901 cw(c30.999,20.901) R8_1.1@30.999,21.1
NetD5_1_2: D5_1.2 R8_1.2 U1_1.4 | length 9.3
  Top Layer w0.4: R8_1.2 cw(c32.601,20.901) 32.8,20.901 D5_1.2
  Top Layer w0.5: D5_1.2 32.8,18.978 ccw(c33.478,18.978) 33.478,18.3 35.763,18.3 cw(c35.763,16.557) 36.995,17.79 37.905,16.88 U1_1.4
NetD5_2_1: D5_2.1 R8_2.1 R9_2.2 | length 3.6
  Top Layer w0.4: R9_2.2@71.3,17.6 D5_2.1 71.3,20.901 cw(c71.499,20.901) R8_2.1
NetD5_2_2: D5_2.2 R8_2.2 U1_2.4 | length 9.3
  Top Layer w0.4: R8_2.2 cw(c73.101,20.901) 73.3,20.901 D5_2.2
  Top Layer w0.5: D5_2.2 73.3,18.978 ccw(c73.978,18.978) 73.978,18.3 76.263,18.3 cw(c76.263,16.557) 77.495,17.79 78.405,16.88 U1_2.4
NetD5_3_1: D5_3.1 R8_3.1 R9_3.2 | length 3.6
  Top Layer w0.4: R9_3.2 D5_3.1 111.824,20.901 cw(c112.023,20.901) R8_3.1
NetD5_3_2: D5_3.2 R8_3.2 U1_3.4 | length 9.3
  Top Layer w0.4: R8_3.2@113.601,21.1 cw(c113.601,20.901) 113.8,20.901 D5_3.2@113.8,19.5
  Top Layer w0.5: D5_3.2@113.8,19.5 113.8,18.978 ccw(c114.478,18.978) 114.478,18.3 116.763,18.3 cw(c116.763,16.557) 117.995,17.79 118.905,16.88 U1_3.4
NetD6_1_1: D6_1.1 Q4_1.1 R9_1.1 | length 3.3
  Top Layer w0.3: D6_1.1 Q4_1.1@25.786,19.2
  Top Layer w1: Q4_1.1@25.786,17.6 R9_1.1
NetD6_1_2: D6_1.2 D7_1.2 Q3_1.1 Q4_1.3 R10_1.1 | length 20.4
  Top Layer w0.3: Q4_1.3@21.214,19.2 D6_1.2
  Top Layer w0.4: D7_1.2 9.982,13.022 ccw(c9.479,13.525) 10.19,13.525 10.19,15.753 Q3_1.1 Q3_1.1@10.19,17.295
  Top Layer w0.7: R10_1.1 Q3_1.1@10.19,17.053
  Top Layer w0.8: Q3_1.1@10.19,17.295 10.19,18.4 cw(c10.99,18.4) 10.99,19.2 Q4_1.3@21.214,19.2
NetD6_2_1: D6_2.1 Q4_2.1 R9_2.1 | length 3.3
  Top Layer w0.3: D6_2.1 Q4_2.1@66.286,19.2
  Top Layer w1: Q4_2.1@66.286,17.6 R9_2.1
NetD6_2_2: D6_2.2 D7_2.2 Q3_2.1 Q4_2.3 R10_2.1 | length 20.4
  Top Layer w0.3: Q4_2.3@61.714,19.2 D6_2.2
  Top Layer w0.4: D7_2.2 50.482,13.022 ccw(c49.979,13.525) 50.69,13.525 50.69,15.753 Q3_2.1 Q3_2.1@50.69,17.295
  Top Layer w0.7: R10_2.1 Q3_2.1@50.69,17.053
  Top Layer w0.8: Q3_2.1@50.69,17.295 50.69,18.4 cw(c51.49,18.4) 51.49,19.2 Q4_2.3@61.714,19.2
NetD6_3_1: D6_3.1 Q4_3.1 R9_3.1 | length 3.3
  Top Layer w0.3: D6_3.1 Q4_3.1@106.786,19.2
  Top Layer w1: Q4_3.1@106.786,17.6 R9_3.1
NetD6_3_2: D6_3.2 D7_3.2 Q3_3.1 Q4_3.3 R10_3.1 | length 20.4
  Top Layer w0.3: Q4_3.3@102.214,19.2 D6_3.2
  Top Layer w0.4: D7_3.2 90.982,13.022 ccw(c90.479,13.525) 91.19,13.525 Q3_3.1 91.19,17.053 Q3_3.1@91.19,17.295
  Top Layer w0.7: R10_3.1 91.19,17.053 Q3_3.1@91.2,17.053
  Top Layer w0.8: Q3_3.1@91.19,17.295 91.19,18.4 cw(c91.99,18.4) 91.99,19.2 Q4_3.3@102.214,19.2
NetR11_1_1: R11_1.1 TP1_1.1 | length 13.2
  Top Layer w0.3: R11_1.1 19.45,16.8 ccw(c20,16.8) 20,16.25 26.086,16.25 cw(c26.086,14.926) 27.41,14.926 TP1_1.1
NetR11_2_1: R11_2.1 TP1_2.1 | length 13.2
  Top Layer w0.3: R11_2.1 59.95,16.8 ccw(c60.5,16.8) 60.5,16.25 66.586,16.25 cw(c66.586,14.926) 67.91,14.926 TP1_2.1
NetR11_3_1: R11_3.1 TP1_3.1 | length 1.8
  Top Layer w0.3: TP1_3.1 R11_3.1
U_5V: C9_1.2 J1.6 U2_1.6 | length 13.2
  Top Layer w0.4: U2_1.6 29.941,5.834 ccw(c29.941,6.293) 30.4,6.293 C9_1.2
  Top Layer w0.5: C9_1.2 36.678,8.4 ccw(c36.678,9.292) 37.57,9.292 J1.6
U_H: J1.2 R4_1.2 | length 2.6
  Top Layer w0.5: J1.2@32.5,11.22 R4_1.2
U_Iout: J1.1 U2_1.5 | length 3.7
  Top Layer w0.4: U2_1.5 32.49,5.184 J1.1
U_L: J1.4 R6_1.2 | length 3
  Top Layer w0.5: R6_1.2 34.356,13.244 cw(c32.73,11.617) 35.03,11.617 J1.4
U_OUT: R5_1.2 TP3.1 U2_1.8 | length 24.3
  Top Layer w0.2: U2_1.8@29.45,7.134 28.506,7.134 cw(c28.506,7.49) 28.15,7.49 28.15,7.74 cw(c28.758,7.74) 28.328,8.17 28.898,8.74 ccw(c27.444,10.194) 29.5,10.194 29.5,19.098 ccw(c28.51,19.098) 29.21,19.799 26.59,22.419 cw(c27.291,23.119) 26.3,23.119 26.3,24.289 cw(c27.011,24.289) 27.011,25 R5_1.2
U_ref_+: C8_1.2 J1.3 U2_1.7 | length 12.2
  Top Layer w0.4: U2_1.7 28.756,6.484 ccw(c28.756,6.078) 28.35,6.078 28.35,3.806 ccw(c28.756,3.806) 28.756,3.4 34.547,3.4 ccw(c34.547,3.883) 35.03,3.883 J1.3
U_ref_-: C8_1.1 J1.5 U2_1.3 | length 15.7
  Top Layer w0.4: U2_1.3 27.162,5.834 cw(c27.162,5.428) 27.569,5.428 27.569,4.1 27.569,3.721 ccw(c28.489,3.721) 28.489,2.8 36.545,2.8 ccw(c36.545,3.825) 37.57,3.825 J1.5
U_Vcc: C3_1.2 D1_1.1 J1.8 U1_1.5 | length 14.4
  Top Layer w0.6: U1_1.5@37.915,20.75 37.915,21.663 cw(c38.652,21.663) 38.652,22.4 D1_1.1 39.373,22.4 cw(c39.373,21.663) 40.11,21.663 40.11,13.8 J1.8
V_5V: C9_2.2 J2.6 U2_2.6 | length 13.2
  Top Layer w0.4: U2_2.6 70.441,5.834 ccw(c70.441,6.293) 70.9,6.293 C9_2.2
  Top Layer w0.5: C9_2.2 77.178,8.4 ccw(c77.178,9.292) 78.07,9.292 J2.6
V_H: J2.2 R4_2.2 | length 2.6
  Top Layer w0.5: J2.2@73,11.22 R4_2.2
V_Iout: J2.1 U2_2.5 | length 3.7
  Top Layer w0.4: U2_2.5 72.99,5.184 J2.1
V_L: J2.4 R6_2.2 | length 3
  Top Layer w0.5: R6_2.2 74.856,13.244 cw(c73.23,11.617) 75.53,11.617 J2.4
V_OUT: R5_2.2 TP6.1 U2_2.8 | length 24.3
  Top Layer w0.2: U2_2.8@69.95,7.134 69.006,7.134 cw(c69.006,7.49) 68.65,7.49 68.65,7.74 cw(c69.258,7.74) 68.828,8.17 69.398,8.74 ccw(c67.944,10.194) 70,10.194 70,19.098 ccw(c69.01,19.098) 69.71,19.799 67.09,22.419 cw(c67.791,23.119) 66.8,23.119 66.8,24.289 cw(c67.511,24.289) 67.511,25 R5_2.2
V_ref_+: C8_2.2 J2.3 U2_2.7 | length 12.2
  Top Layer w0.4: U2_2.7 69.256,6.484 ccw(c69.256,6.078) 68.85,6.078 68.85,3.806 ccw(c69.256,3.806) 69.256,3.4 75.047,3.4 ccw(c75.047,3.883) 75.53,3.883 J2.3
V_ref_-: C8_2.1 J2.5 U2_2.3 | length 15.7
  Top Layer w0.4: U2_2.3 67.662,5.834 cw(c67.662,5.428) 68.069,5.428 68.069,4.1 68.069,3.721 ccw(c68.989,3.721) 68.989,2.8 77.045,2.8 ccw(c77.045,3.825) 78.07,3.825 J2.5
V_Vcc: C3_2.2 D1_2.1 J2.8 U1_2.5 | length 14.4
  Top Layer w0.6: U1_2.5 78.405,21.663 cw(c79.142,21.663) 79.142,22.4 D1_2.1 79.863,22.4 cw(c79.863,21.663) 80.6,21.663 C3_2.2 J2.8@80.6,11.22
VB: C2_1.2 C2_2.2 C2_3.2 Q1_1.4 Q1_2.4 Q1_3.4 R1_1.2 R1_2.2 R1_3.2 TP2.1 TP5.1 TP8.1
W_5V: C9_3.2 J3.6 U2_3.6 | length 13.2
  Top Layer w0.4: U2_3.6 110.951,5.834 ccw(c110.951,6.293) 111.41,6.293 C9_3.2
  Top Layer w0.5: C9_3.2 117.688,8.4 ccw(c117.688,9.292) 118.58,9.292 J3.6@118.58,11.22
W_H: J3.2 R4_3.2 | length 2.6
  Top Layer w0.5: J3.2@113.51,11.22 R4_3.2@113.51,13.8
W_Iout: J3.1 U2_3.5 | length 3.7
  Top Layer w0.4: U2_3.5@110.2,5.184 113.49,5.184 J3.1
W_L: J3.4 R6_3.2 | length 3
  Top Layer w0.5: R6_3.2 115.366,13.244 cw(c113.74,11.617) 116.04,11.617 J3.4@116.04,11.22
W_OUT: R5_3.2 TP9.1 U2_3.8 | length 24.3
  Top Layer w0.2: 107.589,22.419 cw(c108.291,23.119) 107.3,23.119 107.3,24.289 cw(c108.011,24.289) 108.011,25 R5_3.2 ; 107.59,22.419 110.21,19.799 cw(c109.51,19.098) 110.5,19.098 110.5,10.194 cw(c108.444,10.194) 109.898,8.74 109.328,8.17 ccw(c109.758,7.74) 109.15,7.74 109.15,7.49 ccw(c109.506,7.49) 109.506,7.134 U2_3.8@110.45,7.134
W_ref_+: C8_3.2 J3.3 U2_3.7 | length 12.2
  Top Layer w0.4: U2_3.7@110.2,6.484 109.756,6.484 ccw(c109.756,6.078) 109.35,6.078 109.35,3.806 ccw(c109.756,3.806) 109.756,3.4 115.547,3.4 ccw(c115.547,3.883) 116.03,3.883 J3.3
W_ref_-: C8_3.1 J3.5 U2_3.3 | length 15.7
  Top Layer w0.4: U2_3.3@107.68,5.834 108.162,5.834 cw(c108.162,5.428) 108.569,5.428 108.569,4.1 108.569,3.721 ccw(c109.489,3.721) 109.489,2.8 117.545,2.8 ccw(c117.545,3.825) 118.57,3.825 J3.5
W_Vcc: C3_3.2 D1_3.1 J3.8 U1_3.5 | length 14.4
  Top Layer w0.6: U1_3.5@118.915,20.75 118.915,21.663 cw(c119.652,21.663) 119.652,22.4 120.31,22.4 120.373,22.4 cw(c120.373,21.663) 121.11,21.663 121.11,13.8 J3.8
pads on no net: U2_1.4 U2_2.4 U2_3.4

## Polygon pours and split planes (outlines as drawn)
GND on Top Layer "NONET_L02_P-001" (solid, remove dead copper, pour order 13): 0,0 0,29.5 123,29.5 123,0
VB on Top Layer "NONET_L02_P-001" (solid, remove dead copper, pour order 12): 0,60 0,30 123,30 123,60
NetC1_1_2 on Top Layer "NONET_L02_P-001" (solid, remove dead copper, pour order 6): 6.2,24.7 ccw(c6.7,24.7) 6.7,24.2 7.763,24.2 cw(c7.763,23.463) 8.5,23.463 8.5,23.382 8.5,20.2 22.309,20.2 ccw(c22.309,21.191) 23.3,21.191 23.3,25.221 cw(c23.579,25.221) 23.579,25.5 25.443,25.5 ccw(c25.443,26.457) 26.4,26.457 26.4,36.6 ccw(c26.2,36.6) 26.2,36.8 15.4,36.8 11.537,36.8 ccw(c11.537,36.063) 10.8,36.063 10.8,32.645 cw(c10.063,32.645) 10.584,32.124 8.416,29.956 ccw(c8.937,29.435) 8.2,29.435 8.2,28.9 cw(c7.6,28.9) 7.6,28.3 6.937,28.3 ccw(c6.937,27.563) 6.2,27.563
NetC1_2_2 on Top Layer "NONET_L02_P-001" (solid, remove dead copper, pour order 7): 46.7,24.7 ccw(c47.2,24.7) 47.2,24.2 48.263,24.2 cw(c48.263,23.463) 49,23.463 49,23.382 49,20.2 62.809,20.2 ccw(c62.809,21.191) 63.8,21.191 63.8,25.221 cw(c64.079,25.221) 64.079,25.5 65.943,25.5 ccw(c65.943,26.457) 66.9,26.457 66.9,36.6 ccw(c66.7,36.6) 66.7,36.8 55.9,36.8 52.037,36.8 ccw(c52.037,36.063) 51.3,36.063 51.3,32.645 cw(c50.563,32.645) 51.084,32.124 48.916,29.956 ccw(c49.437,29.435) 48.7,29.435 48.7,28.9 cw(c48.1,28.9) 48.1,28.3 47.437,28.3 ccw(c47.437,27.563) 46.7,27.563
NetC1_3_2 on Top Layer "NONET_L02_P-001" (solid, remove dead copper, pour order 11): 87.2,24.7 ccw(c87.7,24.7) 87.7,24.2 88.763,24.2 cw(c88.763,23.463) 89.5,23.463 89.5,23.382 89.5,20.2 103.309,20.2 ccw(c103.309,21.191) 104.3,21.191 104.3,25.221 cw(c104.579,25.221) 104.579,25.5 106.443,25.5 ccw(c106.443,26.457) 107.4,26.457 107.4,36.6 ccw(c107.2,36.6) 107.2,36.8 96.4,36.8 92.537,36.8 ccw(c92.537,36.063) 91.8,36.063 91.8,32.645 cw(c91.063,32.645) 91.584,32.124 89.416,29.956 ccw(c89.937,29.435) 89.2,29.435 89.2,28.9 cw(c88.6,28.9) 88.6,28.3 87.937,28.3 ccw(c87.937,27.563) 87.2,27.563
W_OUT on Top Layer "NONET_L02_P-001" (solid, remove dead copper, pour order 10): 109.688,25.512 109.091,25.512 cw(c109.091,26.503) 108.1,26.503 108.1,39.09 108.1,40.909 cw(c109.091,40.909) 109.091,41.9 110.6,41.9 ccw(c110.6,42.5) 111.2,42.5 111.2,44 cw(c111.6,44) 111.6,44.4 119.009,44.4 cw(c119.009,43.409) 120,43.409 120,21.9 109.9,21.9 109.9,23.45 109.9,25.245 ccw(c109.661,25.272) 109.688,25.512 ccw(c109.684,25.508)
V_OUT on Top Layer "NONET_L02_P-001" (solid, remove dead copper, pour order 9): 69.188,25.512 68.591,25.512 cw(c68.591,26.503) 67.6,26.503 67.6,39.09 67.6,40.909 cw(c68.591,40.909) 68.591,41.9 70.1,41.9 ccw(c70.1,42.5) 70.7,42.5 70.7,44 cw(c71.1,44) 71.1,44.4 78.509,44.4 cw(c78.509,43.409) 79.5,43.409 79.5,21.9 69.4,21.9 69.4,23.45 69.4,25.245 ccw(c69.161,25.272) 69.188,25.512 ccw(c69.184,25.508)
U_OUT on Top Layer "NONET_L02_P-001" (solid, remove dead copper, pour order 8): 28.688,25.512 28.091,25.512 cw(c28.091,26.503) 27.1,26.503 27.1,39.09 27.1,40.909 cw(c28.091,40.909) 28.091,41.9 29.6,41.9 ccw(c29.6,42.5) 30.2,42.5 30.2,44 cw(c30.6,44) 30.6,44.4 38.009,44.4 cw(c38.009,43.409) 39,43.409 39,21.9 28.9,21.9 28.9,23.45 28.9,25.245 ccw(c28.661,25.272) 28.688,25.512 ccw(c28.684,25.508)
no net on Top Solder "NONET_L02_P-001" (solid): 0.5,34.25 ccw(c1,34.25) 1,33.75 5.25,33.75 ccw(c5.25,34.25) 5.75,34.25 5.75,46.945 ccw(c5.013,46.945) 5.534,47.466 2.216,50.784 ccw(c1.695,50.263) 1.695,51 1.237,51 ccw(c1.237,50.263) 0.5,50.263
no net on Top Solder "NONET_L02_P-001" (solid): 5.75,25.013 ccw(c5.013,25.013) 5.013,25.75 1.237,25.75 ccw(c1.237,25.013) 0.5,25.013 0.5,9.737 ccw(c1.237,9.737) 1.237,9 1.695,9 ccw(c1.695,9.737) 2.216,9.216 5.534,12.534 ccw(c5.013,13.055) 5.75,13.055
no net on Top Solder "NONET_L02_P-001" (solid): 41,34.25 ccw(c41.5,34.25) 41.5,33.75 45.75,33.75 ccw(c45.75,34.25) 46.25,34.25 46.25,46.945 ccw(c45.513,46.945) 46.034,47.466 42.716,50.784 ccw(c42.195,50.263) 42.195,51 41.737,51 ccw(c41.737,50.263) 41,50.263
no net on Top Solder "NONET_L02_P-001" (solid): 46.25,25.013 ccw(c45.513,25.013) 45.513,25.75 41.737,25.75 ccw(c41.737,25.013) 41,25.013 41,9.737 ccw(c41.737,9.737) 41.737,9 42.195,9 ccw(c42.195,9.737) 42.716,9.216 46.034,12.534 ccw(c45.513,13.055) 46.25,13.055
no net on Top Solder "NONET_L02_P-001" (solid): 86.75,25.013 ccw(c86.013,25.013) 86.013,25.75 82.237,25.75 ccw(c82.237,25.013) 81.5,25.013 81.5,9.737 ccw(c82.237,9.737) 82.237,9 82.695,9 ccw(c82.695,9.737) 83.216,9.216 86.534,12.534 ccw(c86.013,13.055) 86.75,13.055
no net on Top Solder "NONET_L02_P-001" (solid): 81.5,34.25 ccw(c82,34.25) 82,33.75 86.25,33.75 ccw(c86.25,34.25) 86.75,34.25 86.75,46.945 ccw(c86.013,46.945) 86.534,47.466 83.216,50.784 ccw(c82.695,50.263) 82.695,51 82.237,51 ccw(c82.237,50.263) 81.5,50.263

## Keep-outs
Keep-Out Layer:
  the board outline again, w0

## Other copper
Top Layer:
  pour cut-out: 16.2,0 16.2,3.5 cw(c19.5,3.5) 19.5,6.8 19.5,0
  pour cut-out: 22.8,0 22.8,3.5 ccw(c19.5,3.5) 19.5,6.8 19.5,0
  pour cut-out: 56.7,0 56.7,3.5 cw(c60,3.5) 60,6.8 60,0
  pour cut-out: 56.7,60 56.7,56.5 ccw(c60,56.5) 60,53.2 60,60
  pour cut-out: 63.3,60 63.3,56.5 cw(c60,56.5) 60,53.2 60,60
  pour cut-out: 16.2,60 16.2,56.5 ccw(c19.5,56.5) 19.5,53.2 19.5,60
  pour cut-out: 22.8,60 22.8,56.5 cw(c19.5,56.5) 19.5,53.2 19.5,60
  pour cut-out: 63.3,0 63.3,3.5 ccw(c60,3.5) 60,6.8 60,0
  pour cut-out: 97.2,60 97.2,56.5 ccw(c100.5,56.5) 100.5,53.2 100.5,60
  pour cut-out: 103.8,60 103.8,56.5 cw(c100.5,56.5) 100.5,53.2 100.5,60
  pour cut-out: 103.8,0 103.8,3.5 ccw(c100.5,3.5) 100.5,6.8 100.5,0
  pour cut-out: 97.2,0 97.2,3.5 cw(c100.5,3.5) 100.5,6.8 100.5,0

## Dimensions
0,60 to 123,60 on Mechanical 1
0,60 to 0,0 on Mechanical 1